# Altium PCB PCB2.PcbDoc (part 2 of 2)
Units mm, origin at the board's own origin, x right, y up, seen from the top; angles counter-clockwise.
Board outline 165.86 x 82.04 mm, 2 copper layers (Top Layer, Bottom Layer); 109 components, 117 nets, 440 pads, 32 vias.
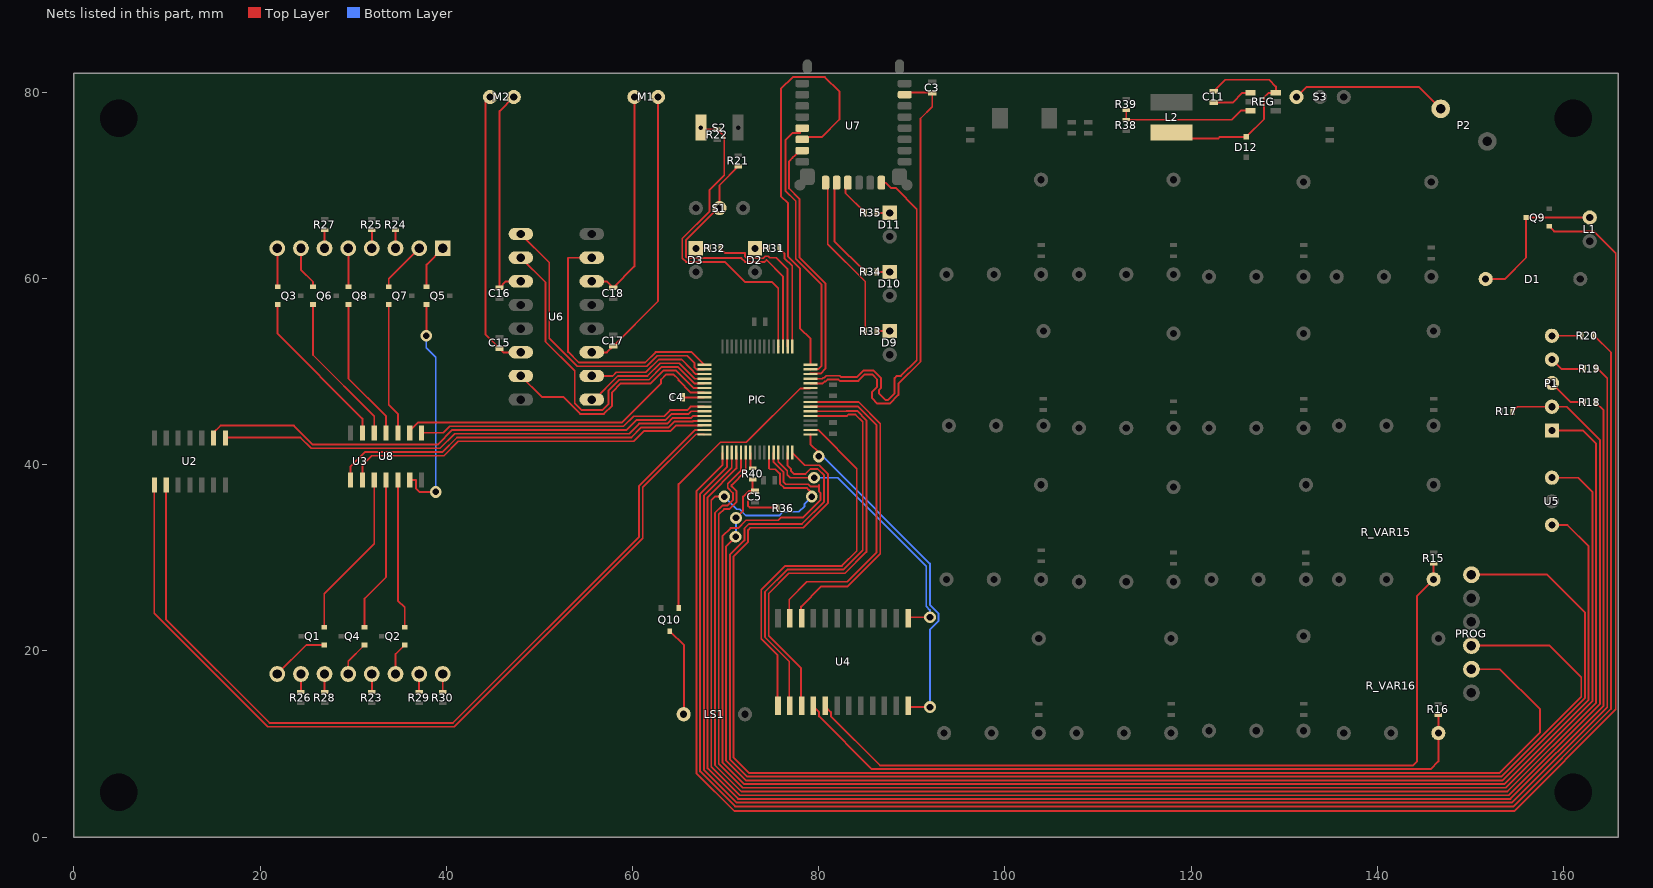
[diagram p2: the nets of this part, all layers, seen from the top]

## Via types
v1: diameter 1.27, hole 0.711, Top Layer to Bottom Layer, 32 vias

## Nets (pads, with @x,y where several pads share a name; then routed paths per layer and width w, separated by ;. In a path a pad name is that pad's centre, name@x,y a point inside that pad or via, vN(x,y) a via of type N, cw(c..) or ccw(c..) an arc to the next point about the centre after c; other vN are vias at no path point) (continued)
"INPUT 15": R15.2 R_VAR15.1 U4.17 | length 88.7
  Top Layer w0.2: U4.17@80.645,14.096 81.315,13.426 81.315,12.972 86.585,7.702 143.846,7.702 144.272,8.128 144.272,25.908 R_VAR15.1@146.05,27.686 R15.2@146.05,29.372
"INPUT 16": R16.2 R_VAR16.1 U4.16 | length 75.6
  Top Layer w0.2: U4.16@79.375,14.096 80.045,13.426 80.045,12.972 85.715,7.302 145.732,7.302 146.558,8.128 R_VAR16.1@146.558,11.176 R16.2@146.558,13.116
MCLR: PIC.7 R40.1 | length 1.8
  Top Layer w0.2: PIC.7@72.656,41.29 72.656,39.866 R40.1@72.898,39.624
NetC3_2: C3.2 PIC.28 U7.23 | length 50.9
  Top Layer w0.2: PIC.28@79.106,48.74 80.432,48.74 80.632,48.94 80.744,48.94 80.96,49.156 82.108,49.156 82.258,49.006 84.26,49.006 84.957,49.703 85.731,49.703 86.279,49.155 86.279,48.381 85.731,47.833 85.731,47.134 86.294,46.571 87.62,46.571 88.557,47.508 88.557,48.702 90.932,51.077 90.932,77.187 92.202,78.457 C3.2@92.202,79.918 92.123,79.997 89.232,79.997 U7.23@88.978,79.743
NetC4_1: C4.1 PIC.56 | length 2.3
  Top Layer w0.2: C4.1@65.37,47.244 65.374,47.24 PIC.56@67.706,47.24
NetC5_1: C5.1 PROG.1 R36.1 R40.2 | length 156.9
  Top Layer w0.2: v1(71.077,32.258) 70.061,31.242 70.061,8.213 72.172,6.102 153.469,6.102 162.3,14.933 162.3,24.136 158.242,28.194 PROG.1@150.114,28.194 ; v1(71.12,34.29) 71.882,35.052 71.882,36.576 72.482,37.176 C5.1@72.99,37.176 ; R40.2@72.898,38.424 72.898,37.43 C5.1@73.152,37.176 C5.1@72.99,37.176 ; R36.1@75.6,35.426 72.578,35.426 72.402,35.602 72.402,36.588 C5.1@72.99,37.176
  Bottom Layer w0.2: v1(71.077,32.258) 71.12,32.301 v1(71.12,34.29)
NetC11_1: C11.1 D12.2 L2.1 REG.6 | length 23.6
  Top Layer w0.2: L2.1@117.33,75.68 117.972,75.038 122.905,75.038 123.087,75.22 D12.2@125.92,75.22 127.828,77.128 127.828,79.458 128.314,79.944 129.112,79.944 129.112,80.618 128.38,81.35 123.676,81.35 C11.1@122.428,80.102
NetC11_2: C11.2 REG.1 | length 4.4
  Top Layer w0.2: C11.2@122.428,78.902 124.46,78.902 125.502,79.944 REG.1@126.412,79.944
NetC15_1: C15.1 M2.2 U6.14 | length 30.3
  Top Layer w0.2: M2.2@44.704,79.502 44.196,78.994 44.196,54.01 C15.1@45.72,52.486 46.136,52.07 U6.14@48.006,52.07
NetC16_2: C16.2 M2.1 U6.11 | length 23.7
  Top Layer w0.2: M2.1@47.244,79.502 45.72,77.978 C16.2@45.72,59.02 46.39,59.69 U6.11@48.006,59.69
NetC17_2: C17.2 M1.1 U6.3 | length 31.3
  Top Layer w0.2: U6.3@55.626,52.07 57.242,52.07 C17.2@57.912,52.74 62.738,57.566 M1.1@62.738,79.502
NetC18_1: C18.1 M1.2 U6.6 | length 24
  Top Layer w0.2: U6.6@55.626,59.69 57.242,59.69 C18.1@57.912,59.02 60.198,61.306 M1.2@60.198,79.502
NetD1_1: D1.1 L1.2 Q9.3 | length 16.4
  Top Layer w0.2: D1.1@151.638,59.944 D1.1@151.64,59.944 153.67,59.944 155.986,62.26 Q9.3@155.986,66.548 L1.2@162.814,66.548
NetD2_1: D2.1 R31.2 | length 1.4
  Top Layer w0.2: D2.1@73.152,63.246 R31.2@74.584,63.246
NetD3_1: D3.1 R32.2 | length 1.4
  Top Layer w0.2: D3.1@66.802,63.246 R32.2@68.234,63.246
NetD9_1: D9.1 R33.1 | length 1.4
  Top Layer w0.2: R33.1@86.198,54.356 D9.1@87.63,54.356
NetD10_1: D10.1 R34.1 | length 1.4
  Top Layer w0.2: R34.1@86.198,60.706 D10.1@87.63,60.706
NetD11_1: D11.1 R35.1 | length 1.4
  Top Layer w0.2: R35.1@86.198,67.056 D11.1@87.63,67.056
NetLS1_2: LS1.2 Q10.3 | length 9.6
  Top Layer w0.2: Q10.3@64.008,22.128 65.534,20.602 LS1.2@65.534,13.208
NetP1_1: P1.1 PIC.5 | length 168.4
  Top Layer w0.2: PIC.5@71.656,41.29 71.656,39.398 70.237,37.979 70.237,37.511 70.785,36.963 70.785,36.189 70.237,35.641 69.677,35.641 68.861,34.825 68.861,7.716 71.675,4.902 153.966,4.902 163.5,14.436 163.5,42.24 162.052,43.688 P1.1@158.75,43.688
NetP1_2: P1.2 PIC.11 R17.1 | length 190
  Top Layer w0.2: v1(69.85,36.576) 68.834,36.576 68.461,36.203 68.461,7.55 71.509,4.502 154.131,4.502 163.9,14.271 163.9,42.672 160.344,46.228 P1.2@158.75,46.228 155.032,46.228 R17.1@154.524,45.72 ; PIC.11@74.656,41.29 74.656,39.644 74.784,39.516 75.35,39.516 75.826,39.04 75.826,37.973 76.288,37.511 78.711,37.511 78.949,37.273 78.978,37.273 79.248,37.003 v1(79.248,36.576)
  Bottom Layer w0.2: v1(69.85,36.576) 71.201,35.225 71.507,35.225 72.188,34.544 75.744,34.544 76.144,34.944 77.87,34.944 78.486,35.56 78.486,35.814 v1(79.248,36.576) v1@79.243,36.576
NetP1_3: P1.3 R18.2 | length 4.3
  Top Layer w0.2: P1.3@158.75,48.768 160.782,46.736 R18.2@162.214,46.736
NetP1_4: P1.4 R19.2 | length 3.9
  Top Layer w0.2: P1.4@158.75,51.308 159.766,50.292 R19.2@162.214,50.292
NetP1_5: P1.5 R20.2 | length 3.2
  Top Layer w0.2: P1.5@158.75,53.848 R20.2@161.96,53.848
NetP2_1: P2.1 S3.1 | length 16.9
  Top Layer w0.2: S3.1@131.318,79.502 132.38,80.564 144.48,80.564 P2.1@146.812,78.232
NetPIC32Square_1: PIC.1 Q9.1 | length 197.9
  Top Layer w0.2: PIC.1@69.66,41.29 69.66,39.942 66.861,37.143 66.861,6.887 70.954,2.794 154.686,2.794 165.608,13.716 165.608,62.716 163.254,65.07 158.994,65.07 Q9.1@158.466,65.598
NetPIC32Square_2: PIC.2 R20.1 | length 180
  Top Layer w0.2: PIC.2@70.156,41.29 70.156,39.784 67.261,36.889 67.261,7.053 71.012,3.302 154.628,3.302 165.1,13.774 165.1,52.07 R20.1@163.322,53.848
NetPIC32Square_3: PIC.3 R19.1 | length 175.1
  Top Layer w0.2: PIC.3@70.656,41.29 70.656,39.668 67.661,36.673 67.661,7.219 71.178,3.702 154.463,3.702 164.7,13.939 164.7,49.276 163.684,50.292 R19.1@163.414,50.292
NetPIC32Square_4: PIC.4 R18.1 | length 169.9
  Top Layer w0.2: PIC.4@71.156,41.29 71.156,39.602 68.061,36.507 68.061,7.384 71.343,4.102 154.297,4.102 164.3,14.105 164.3,45.85 R18.1@163.414,46.736
NetPIC32Square_6: PIC.6 U5.3 | length 161.6
  Top Layer w0.2: PIC.6@72.156,41.29 72.156,39.332 70.637,37.814 70.637,37.677 71.185,37.129 71.185,36.023 70.403,35.241 69.843,35.241 69.261,34.659 69.261,7.881 71.84,5.302 153.8,5.302 163.1,14.602 163.1,37.084 161.576,38.608 U5.3@158.75,38.608
NetPIC32Square_12: PIC.12 U5.1 | length 164.9
  Top Layer w0.2: PIC.12@75.156,41.29 75.156,40.275 76.226,39.205 76.226,38.139 76.454,37.911 78.877,37.911 79.115,37.673 79.889,37.673 80.037,37.821 80.037,37.109 80.183,36.963 80.183,36.189 78.346,34.352 75.968,34.352 75.652,34.036 72.188,34.036 71.345,33.193 70.531,33.193 69.661,32.323 69.661,8.047 72.006,5.702 153.634,5.702 162.7,14.768 162.7,31.242 160.414,33.528 U5.1@158.75,33.528
NetPIC32Square_13: PIC.13 U4.1 | length 29.8
  Top Layer w0.2: PIC.13@75.656,41.29 75.656,40.341 76.626,39.371 76.626,38.901 76.919,38.608 v1(79.502,38.608) ; U4.1@89.535,23.622 v1(91.948,23.622)
  Bottom Layer w0.2: v1(79.502,38.608) 82.042,38.608 91.548,29.102 91.548,24.779 91.948,24.379 v1(91.948,23.622)
NetPIC32Square_15: PIC.15 PROG.4 | length 155.4
  Top Layer w0.2: PIC.15@76.656,41.29 76.656,39.907 77.026,39.537 77.026,39.306 77.324,39.008 78.58,39.008 79.115,39.543 79.889,39.543 80.583,38.849 80.583,36.023 78.196,33.636 72.498,33.636 72.012,33.15 72.012,31.871 70.461,30.32 70.461,8.378 72.337,6.502 153.303,6.502 161.9,15.099 161.9,17.17 158.496,20.574 PROG.4@150.114,20.574
NetPIC32Square_16: PIC.16 PROG.5 | length 143.5
  Top Layer w0.2: PIC.16@77.156,41.29 78.503,39.943 80.055,39.943 80.983,39.015 80.983,35.857 78.362,33.236 72.664,33.236 72.412,32.984 72.412,31.705 70.861,30.154 70.861,8.544 72.503,6.902 153.137,6.902 157.48,11.245 157.48,13.716 153.162,18.034 PROG.5@150.114,18.034
NetPIC32Square_17: PIC.17 U4.24 | length 38
  Top Layer w0.2: PIC.17@79.106,43.24 79.106,42.224 80.01,41.32 v1(80.01,40.894) ; U4.24@89.535,13.97 v1(91.948,13.97)
  Bottom Layer w0.2: v1(80.01,40.894) 80.436,40.894 91.948,29.382 91.948,24.944 92.883,24.009 92.883,23.235 91.948,22.3 v1(91.948,13.97)
NetPIC32Square_18: PIC.18 U4.13 | length 40.7
  Top Layer w0.2: U4.13@75.565,14.096 75.565,19.57 73.83,21.305 73.83,26.586 76.384,29.14 82.492,29.14 84.086,30.734 84.086,39.584 79.93,43.74 PIC.18@79.106,43.74
NetPIC32Square_21: PIC.21 U4.14 | length 45.5
  Top Layer w0.2: U4.14@76.835,14.096 76.835,18.865 74.23,21.47 74.23,26.334 76.636,28.74 82.658,28.74 84.728,30.81 84.728,44.61 83.953,45.385 83.179,45.385 83.034,45.24 PIC.21@79.106,45.24
NetPIC32Square_22: PIC.22 U4.15 | length 46.5
  Top Layer w0.2: U4.15@78.105,14.096 78.105,18.161 74.63,21.636 74.63,26.168 76.802,28.34 82.823,28.34 85.128,30.645 85.128,44.776 84.119,45.785 83.013,45.785 82.968,45.74 PIC.22@79.106,45.74
NetPIC32Square_23: PIC.23 U4.11 | length 35.1
  Top Layer w0.2: U4.11@76.835,23.496 76.835,25.527 78.74,27.432 83.047,27.432 86.214,30.599 86.214,44.256 84.23,46.24 PIC.23@79.106,46.24
NetPIC32Square_24: PIC.24 U4.10 | length 34.6
  Top Layer w0.2: U4.10@78.105,23.496 78.105,24.765 80.264,26.924 83.105,26.924 86.614,30.433 86.614,44.421 84.295,46.74 PIC.24@79.106,46.74
NetPIC32Square_27: PIC.27 Q10.1 | length 31.7
  Top Layer w0.2: Q10.1@64.958,24.608 64.958,37.916 69.452,42.41 72.235,42.41 78.015,48.19 79.056,48.19 PIC.27@79.106,48.24
NetPIC32Square_29: PIC.29 U7.15 | length 38.7
  Top Layer w0.2: PIC.29@79.106,49.24 80.367,49.24 80.467,49.34 80.578,49.34 80.794,49.556 82.274,49.556 82.424,49.406 84.094,49.406 84.791,50.103 85.897,50.103 86.679,49.321 86.679,48.215 86.46,47.996 86.46,47.671 87.16,46.971 87.454,46.971 88.157,47.674 88.157,49.306 88.391,49.54 88.829,49.54 90.532,51.243 90.532,67.466 88.255,69.743 87.738,69.743 87.188,70.293 U7.15@86.478,70.293
NetPIC32Square_30: PIC.30 U7.7 | length 27.5
  Top Layer w0.2: U7.7@77.978,73.743 77.478,73.243 77.475,73.243 77.182,72.95 77.182,72.947 76.828,72.593 76.828,69.67 77.928,68.571 77.928,62.276 80.71,59.493 80.71,50.303 80.197,49.79 79.056,49.79 PIC.30@79.106,49.74
NetPIC32Square_31: PIC.31 U7.5 | length 29.7
  Top Layer w0.2: U7.5@77.978,76.143 77.978,75.643 77.221,75.643 76.428,74.85 76.428,69.426 77.528,68.326 77.528,62.11 80.31,59.328 80.31,50.62 79.98,50.29 79.056,50.29 PIC.31@79.106,50.24
NetPIC32Square_32: PIC.32 U7.6 | length 46.5
  Top Layer w0.2: U7.6@77.978,74.943 78.219,75.184 80.316,75.184 82.215,77.083 82.215,80.091 80.663,81.643 77.221,81.643 75.946,80.368 75.946,68.834 76.708,68.072 76.708,62.364 77.978,61.094 77.978,54.683 79.122,53.539 79.122,50.756 PIC.32@79.106,50.74
NetPIC32Square_33: PIC.33 R31.1 | length 11.2
  Top Layer w0.2: R31.1@75.784,63.246 76.308,62.722 76.308,62.198 77.156,61.35 77.156,52.69 PIC.33@77.106,52.69
NetPIC32Square_34: PIC.34 R32.1 | length 16.9
  Top Layer w0.2: R32.1@69.434,63.246 69.92,62.76 72.09,62.76 72.09,62.36 72.266,62.184 74.038,62.184 74.243,62.389 74.575,62.389 74.734,62.23 75.438,62.23 76.656,61.012 PIC.34@76.656,52.69
NetPIC32Square_35: PIC.35 R21.1 S1.2 | length 31.1
  Top Layer w0.2: R21.1@71.374,72.044 69.342,70.012 S1.2@69.342,67.564 69.172,67.564 65.74,64.132 65.74,62.36 65.916,62.184 67.688,62.184 67.698,62.194 71.69,62.194 72.1,61.784 74.204,61.784 74.409,61.989 76.156,60.242 PIC.35@76.156,52.69
NetPIC32Square_36: PIC.36 R22.2 S2.2 | length 35.8
  Top Layer w0.2: S2.2@67.342,76.2 67.504,76.038 R22.2@69.088,76.038 69.85,75.276 69.85,71.086 68.28,69.516 68.28,67.238 65.34,64.298 65.34,62.194 65.75,61.784 69.916,61.784 72.056,59.644 74.976,59.644 75.656,58.964 75.656,52.69 PIC.36@75.692,52.726
NetPIC32Square_49: PIC.49 U6.7 | length 28.8
  Top Layer w0.2: U6.7@55.626,62.23 53.086,62.23 53.086,52.128 54.234,50.98 61.36,50.98 62.483,52.103 66.343,52.103 PIC.49@67.706,50.74
NetPIC32Square_50: PIC.50 U6.9 | length 31.7
  Top Layer w0.2: U6.9@48.006,64.77 51.054,61.722 51.054,53.594 54.068,50.58 61.525,50.58 62.648,51.703 65.899,51.703 66.656,50.946 66.656,50.466 66.882,50.24 PIC.50@67.706,50.24
NetPIC32Square_51: PIC.51 U6.2 | length 13.5
  Top Layer w0.2: U6.2@55.626,49.53 57.854,49.53 58.254,49.93 61.441,49.93 62.814,51.303 65.283,51.303 66.256,50.33 66.256,50.3 66.816,49.74 PIC.51@67.706,49.74
NetPIC32Square_52: PIC.52 U6.1 | length 14.4
  Top Layer w0.2: U6.1@55.626,46.99 55.88,46.99 58.42,49.53 61.607,49.53 62.98,50.903 65.036,50.903 66.699,49.24 PIC.52@67.706,49.24
NetPIC32Square_53: PIC.53 U6.10 | length 35.8
  Top Layer w0.2: U6.10@48.006,62.23 50.654,59.582 50.654,53.232 53.8,50.086 53.8,46.59 54.53,45.86 56.77,45.86 57.41,46.5 57.41,47.954 58.586,49.13 61.772,49.13 63.145,50.503 64.871,50.503 66.634,48.74 PIC.53@67.706,48.74
NetPIC32Square_54: PIC.54 U6.15 | length 24.9
  Top Layer w0.2: U6.15@48.006,49.53 50.254,47.282 52.542,47.282 54.364,45.46 56.936,45.46 57.81,46.334 57.81,47.789 58.751,48.73 61.938,48.73 63.311,50.103 64.705,50.103 66.568,48.24 PIC.54@67.706,48.24
NetPIC32Square_55: PIC.55 U8.9 | length 35.5
  Top Layer w0.2: U8.9@36.068,43.434 36.068,43.668 36.934,44.534 58.868,44.534 63.073,48.739 63.073,49.155 63.621,49.703 64.395,49.703 64.943,49.155 64.943,49.063 66.266,47.74 PIC.55@67.706,47.74
NetPIC32Square_58: PIC.58 U8.8 | length 31.5
  Top Layer w0.2: U8.8@37.338,43.434 39.686,43.434 40.386,44.134 59.033,44.134 60.111,45.212 63.392,45.212 64.046,45.866 65.874,45.866 66.248,46.24 PIC.58@67.706,46.24
NetPIC32Square_59: PIC.59 U2.2 | length 55.9
  Top Layer w0.2: U2.2@14.986,42.926 14.986,43.434 15.748,44.196 23.622,44.196 25.654,42.164 39.07,42.164 40.64,43.734 59.374,43.734 60.452,44.812 63.558,44.812 64.212,45.466 66.04,45.466 66.314,45.74 PIC.59@67.706,45.74
NetPIC32Square_60: PIC.60 U2.1 | length 53.4
  Top Layer w0.2: U2.1@16.256,42.926 24.326,42.926 25.488,41.764 39.324,41.764 40.894,43.334 59.628,43.334 60.706,44.412 63.723,44.412 64.339,45.028 66.306,45.028 66.518,45.24 PIC.60@67.706,45.24
NetPIC32Square_61: PIC.61 U8.1 | length 41
  Top Layer w0.2: U8.1@29.718,38.354 29.718,39.84 31.242,41.364 39.586,41.364 41.148,42.926 59.874,42.926 60.96,44.012 63.889,44.012 64.505,44.628 66.472,44.628 66.548,44.704 PIC.61@67.218,44.704
NetPIC32Square_62: PIC.62 U8.2 | length 39.8
  Top Layer w0.2: U8.2@30.988,38.354 30.988,39.948 32.004,40.964 39.752,40.964 41.304,42.516 60.118,42.516 61.214,43.612 64.055,43.612 64.639,44.196 PIC.62@67.47,44.196
NetPIC32Square_63: PIC.63 U2.9 | length 93.1
  Top Layer w0.2: U2.9@9.906,37.846 9.906,25.908 9.906,23.368 21.012,12.262 40.71,12.262 60.706,32.258 60.706,37.731 66.715,43.74 PIC.63@67.706,43.74
NetPIC32Square_64: PIC.64 U2.8 | length 94.4
  Top Layer w0.2: 8.636,26.612 U2.8@8.636,37.846 ; 8.636,26.924 8.636,24.072 20.846,11.862 40.876,11.862 61.106,32.092 61.106,37.565 66.819,43.278 67.668,43.278 PIC.64@67.706,43.24
NetR23_1: R23.1 U3.13 | length 1.9
  Top Layer w0.2: R23.1@32.004,15.586 U3.13@32.004,17.526
NetR24_1: R24.1 U3.3 | length 1.9
  Top Layer w0.2: U3.3@34.544,63.246 R24.1@34.544,65.186
NetR25_1: R25.1 U3.4 | length 1.9
  Top Layer w0.2: U3.4@32.004,63.246 R25.1@32.004,65.186
NetR26_1: R26.1 U3.10 | length 1.9
  Top Layer w0.2: R26.1@24.384,15.586 U3.10@24.384,17.526
NetR27_1: R27.1 U3.6 | length 1.9
  Top Layer w0.2: U3.6@26.924,63.246 R27.1@26.924,65.186
NetR28_1: R28.1 U3.11 | length 1.9
  Top Layer w0.2: R28.1@26.924,15.586 U3.11@26.924,17.526
NetR29_1: R29.1 U3.15 | length 1.9
  Top Layer w0.2: R29.1@37.084,15.586 U3.15@37.084,17.526
NetR30_1: R30.1 U3.16 | length 1.9
  Top Layer w0.2: R30.1@39.624,15.586 U3.16@39.624,17.526
NetR38_2: R38.2 R39.1 REG.3 | length 14.9
  Top Layer w0.2: R39.1@113.03,78.14 R39.1@113.03,78.094 R38.2@113.03,77.054 124.356,77.054 125.346,78.044 REG.3@126.412,78.044
PIO1: R33.2 U7.10 | length 17.8
  Top Layer w0.2: U7.10@80.478,70.293 80.978,69.793 80.978,63.702 84.998,59.682 R33.2@84.998,54.356
PIO2: R34.2 U7.11 | length 11
  Top Layer w0.2: U7.11@81.678,70.293 81.678,64.026 R34.2@84.998,60.706
PIO3: R35.2 U7.12 | length 4.1
  Top Layer w0.2: U7.12@82.878,70.293 82.878,69.176 R35.2@84.998,67.056
Q1: Q1.2 U8.3 | length 18
  Top Layer w0.2: Q1.2@26.894,22.54 26.894,26.132 32.258,31.496 U8.3@32.258,38.354
Q2: Q2.2 U8.5 | length 16.1
  Top Layer w0.2: U8.5@34.798,38.354 34.798,25.4 35.53,24.668 Q2.2@35.53,22.54
Q3: Q3.2 U8.13 | length 17.6
  Top Layer w0.2: Q3.2@21.874,57.216 21.874,54.072 30.988,44.958 U8.13@30.988,43.434
Q4: Q4.2 U8.4 | length 16.8
  Top Layer w0.2: Q4.2@31.212,22.54 31.212,25.624 33.528,27.94 U8.4@33.528,38.354
Q5: Q5.2 U8.6 | length 24.4
  Top Layer w0.2: U8.6@36.068,38.354 36.759,38.354 36.759,37.428 37.102,37.084 v1(38.862,37.084) ; v1(37.846,53.848) 37.876,53.878 Q5.2@37.876,57.216
  Bottom Layer w0.2: v1(37.846,53.848) 37.846,52.578 38.862,51.562 v1(38.862,37.084)
Q6: Q6.2 U8.12 | length 16.5
  Top Layer w0.2: Q6.2@25.684,57.216 25.684,51.786 32.258,45.212 U8.12@32.258,43.434
Q7: Q7.2 U8.10 | length 14.2
  Top Layer w0.2: Q7.2@33.812,57.216 33.812,46.452 34.798,45.466 U8.10@34.798,43.434
Q8: Q8.2 U8.11 | length 15.5
  Top Layer w0.2: Q8.2@29.494,57.216 29.494,49.246 33.528,45.212 U8.11@33.528,43.434
"ROW 1": Q1.1 U3.9 | length 6.3
  Top Layer w0.2: U3.9@21.844,17.526 24.958,20.64 Q1.1@26.894,20.64
"ROW 2": Q2.1 U3.14 | length 3.5
  Top Layer w0.2: U3.14@34.544,17.526 34.544,19.654 Q2.1@35.53,20.64
"ROW 3": Q3.1 U3.8 | length 4.1
  Top Layer w0.2: U3.8@21.844,63.246 21.874,63.216 Q3.1@21.874,59.116
"ROW 4": Q4.1 U3.12 | length 3.8
  Top Layer w0.2: U3.12@29.464,17.526 29.464,18.892 Q4.1@31.212,20.64
"ROW 5": Q5.1 U3.1 | length 4.9
  Top Layer w0.2: Q5.1@37.876,59.116 37.876,61.498 U3.1@39.624,63.246
"ROW 6": Q6.1 U3.7 | length 4.7
  Top Layer w0.2: U3.7@24.384,63.246 24.384,60.96 25.684,59.66 Q6.1@25.684,59.116
"ROW 7": Q7.1 U3.2 | length 5.5
  Top Layer w0.2: Q7.1@33.812,59.116 33.812,59.974 U3.2@37.084,63.246
"ROW 8": Q8.1 U3.5 | length 4.1
  Top Layer w0.2: U3.5@29.464,63.246 29.494,63.216 Q8.1@29.494,59.116
pads on no net: PIC.8 PIC.14 PIC.37 PIC.39 PIC.40 PIC.42 PIC.43 PIC.44 PIC.45 PIC.46 PIC.47 PIC.48 PROG.6 R_VAR1.3 R_VAR1.4 R_VAR2.3 R_VAR2.4 R_VAR3.3 R_VAR3.4 R_VAR4.3 R_VAR4.4 R_VAR5.3 R_VAR5.4 R_VAR6.3 R_VAR6.4 R_VAR7.3 R_VAR7.4 R_VAR8.3 R_VAR8.4 R_VAR9.3 R_VAR9.4 R_VAR10.3 R_VAR10.4 R_VAR11.3 R_VAR11.4 R_VAR12.3 R_VAR12.4 R_VAR13.3 R_VAR13.4 R_VAR14.3 R_VAR14.4 R_VAR15.3 R_VAR15.4 R_VAR16.3 R_VAR16.4 S1.3 S3.3 U7.1A U7.2 U7.3 U7.4 U7.8 U7.13 U7.14 U7.17 U7.18 U7.19 U7.20 U7.21 U7.22 U7.24A

## Polygon pours and split planes (outlines as drawn)
GND on Bottom Layer "GND" (solid, remove dead copper, pour order 8): 0,0 165.862,0 165.862,82.042 0,82.042
GND on Bottom Layer "GND" (solid, pour order 10): 0,82.042 0,0 165.862,0 165.862,82.042

## Silkscreen, mask and mechanical layers (free items; w line width, h text height)
Mechanical 11:
  lines w1: 165.824,0 0,0 0,82.042 165.824,82.042 ; 165.862,0 165.862,82.042
Drill Drawing:
  circle w0.025: c-62.325,-38.122 r0.381
  circle w0.025: c-62.325,-38.122 r0.635
  circle w0.025: c-62.325,-60.982 r0.635
  lines w0.025: -62.96,-57.807 -61.69,-57.807 -61.69,-56.537 -62.96,-56.537 -62.96,-57.807 ; -62.96,-53.997 -62.325,-53.679 -61.69,-53.997 -62.007,-53.362 -61.69,-52.727 -62.325,-53.044 -62.96,-52.727 -62.642,-53.362 -62.96,-53.997 ; -62.96,-49.869 -62.642,-49.869 -62.325,-50.187 -62.007,-49.869 -61.69,-49.869 -62.007,-49.552 -61.69,-49.234 -62.007,-49.234 -62.325,-48.917 -62.642,-49.234 -62.96,-49.234 -62.642,-49.552 -62.96,-49.869 ; -62.96,-46.059 -62.642,-46.059 -62.642,-46.377 -62.007,-46.377 -62.007,-46.059 -61.69,-46.059 -61.69,-45.424 -62.007,-45.424 -62.007,-45.107 -62.642,-45.107 -62.642,-45.424 -62.96,-45.424 -62.96,-46.059 ; -62.96,-42.567 -62.96,-42.249 -62.642,-41.932 -62.96,-41.614 -62.96,-41.297 -62.642,-41.297 -62.325,-41.614 -62.007,-41.297 -61.69,-41.297 -61.69,-41.614 -62.007,-41.932 -61.69,-42.249 -61.69,-42.567 -62.007,-42.567 -62.325,-42.249 -62.642,-42.567 -62.96,-42.567
  lines w0.381: -64.69,-62.76 292.129,-62.76 ; -64.69,-36.09 292.129,-36.09 ; -50.698,-66.57 -50.698,-32.28 ; -35.716,-66.57 -35.716,-32.28 ; -6.514,-66.57 -6.514,-32.28 ; 6.335,-66.57 6.335,-32.28 ; 24.974,-66.57 24.974,-32.28 ; 55.191,-66.57 55.191,-32.28 ; 81.599,-66.57 81.599,-32.28 ; 108.008,-66.57 108.008,-32.28 ; 134.416,-66.57 134.416,-32.28 ; 160.824,-66.57 160.824,-32.28 ; 194.698,-66.57 194.698,-32.28 ; 228.571,-66.57 228.571,-32.28 ; 256.503,-66.57 256.503,-32.28 ; -64.69,-66.57 292.129,-66.57 292.129,-32.28 -64.69,-32.28 -64.69,-66.57
  text "Symbol" at -62.404,-34.947 h1.83
  text "Count" at -49.555,-34.947 h1.83
  text "Hole Size" at -34.573,-34.947 h1.83
  text "Plated" at -5.371,-34.947 h1.83
  text "Hole Type" at 7.478,-34.947 h1.83
  text "Drill Layer Pair" at 26.117,-34.947 h1.83
  text "Via/Pad" at 56.334,-34.947 h1.83
  text "Pad Shape" at 82.742,-34.947 h1.83
  text "Template" at 109.151,-34.947 h1.83
  text "Description" at 135.559,-34.947 h1.83
  text "Hole Tolerance (+)" at 161.967,-34.947 h1.83
  text "Hole Tolerance (-)" at 195.841,-34.947 h1.83
  text "Hole Length" at 229.714,-34.947 h1.83
  text "Routed Path Length" at 257.646,-34.947 h1.83
  text "2" at -49.555,-38.757 h1.52
  text "0.500mm (19.69mil)" at -34.573,-38.757 h1.52
  text "PTH" at -5.371,-38.757 h1.52
  text "Slot" at 7.478,-38.757 h1.52
  text "0.000mm (0.00mil)" at 26.117,-38.757 h1.52
  text "0.000mm (0.00mil)" at 56.334,-38.757 h1.52
  text "0.000mm (0.00mil)" at 82.742,-38.757 h1.52
  text "0.000mm (0.00mil)" at 109.151,-38.757 h1.52
  text "0.000mm (0.00mil)" at 135.559,-38.757 h1.52
  text "0.000mm (0.00mil)" at 161.967,-38.757 h1.52
  text "0.000mm (0.00mil)" at 195.841,-38.757 h1.52
  text "2.300mm (90.55mil)" at 229.714,-38.757 h1.52
  text "1.800mm (70.87mil)" at 257.646,-38.757 h1.52
  text "4" at -49.555,-42.567 h1.52
  text "4.000mm (157.48mil)" at -34.573,-42.567 h1.52
  text "NPTH" at -5.371,-42.567 h1.52
  text "Round" at 7.478,-42.567 h1.52
  text "0.000mm (0.00mil)" at 26.117,-42.567 h1.52
  text "0.000mm (0.00mil)" at 56.334,-42.567 h1.52
  text "0.000mm (0.00mil)" at 82.742,-42.567 h1.52
  text "0.000mm (0.00mil)" at 109.151,-42.567 h1.52
  text "0.000mm (0.00mil)" at 135.559,-42.567 h1.52
  text "0.000mm (0.00mil)" at 161.967,-42.567 h1.52
  text "0.000mm (0.00mil)" at 195.841,-42.567 h1.52
  text "6" at -49.555,-46.377 h1.52
  text "1.020mm (40.16mil)" at -34.573,-46.377 h1.52
  text "PTH" at -5.371,-46.377 h1.52
  text "Round" at 7.478,-46.377 h1.52
  text "0.000mm (0.00mil)" at 26.117,-46.377 h1.52
  text "0.000mm (0.00mil)" at 56.334,-46.377 h1.52
  text "0.000mm (0.00mil)" at 82.742,-46.377 h1.52
  text "0.000mm (0.00mil)" at 109.151,-46.377 h1.52
  text "0.000mm (0.00mil)" at 135.559,-46.377 h1.52
  text "0.000mm (0.00mil)" at 161.967,-46.377 h1.52
  text "0.000mm (0.00mil)" at 195.841,-46.377 h1.52
  text "16" at -49.555,-50.187 h1.52
  text "0.900mm (35.43mil)" at -34.573,-50.187 h1.52
  text "PTH" at -5.371,-50.187 h1.52
  text "Round" at 7.478,-50.187 h1.52
  text "0.000mm (0.00mil)" at 26.117,-50.187 h1.52
  text "0.000mm (0.00mil)" at 56.334,-50.187 h1.52
  text "0.000mm (0.00mil)" at 82.742,-50.187 h1.52
  text "0.000mm (0.00mil)" at 109.151,-50.187 h1.52
  text "0.000mm (0.00mil)" at 135.559,-50.187 h1.52
  text "0.000mm (0.00mil)" at 161.967,-50.187 h1.52
  text "0.000mm (0.00mil)" at 195.841,-50.187 h1.52
  text "18" at -49.555,-53.997 h1.52
  text "1.000mm (39.37mil)" at -34.573,-53.997 h1.52
  text "PTH" at -5.371,-53.997 h1.52
  text "Round" at 7.478,-53.997 h1.52
  text "0.000mm (0.00mil)" at 26.117,-53.997 h1.52
  text "0.000mm (0.00mil)" at 56.334,-53.997 h1.52
  text "0.000mm (0.00mil)" at 82.742,-53.997 h1.52
  text "0.000mm (0.00mil)" at 109.151,-53.997 h1.52
  text "0.000mm (0.00mil)" at 135.559,-53.997 h1.52
  text "0.000mm (0.00mil)" at 161.967,-53.997 h1.52
  text "0.000mm (0.00mil)" at 195.841,-53.997 h1.52
  text "32" at -49.555,-57.807 h1.52
  text "0.711mm (28.00mil)" at -34.573,-57.807 h1.52
  text "PTH" at -5.371,-57.807 h1.52
  text "Round" at 7.478,-57.807 h1.52
  text "0.000mm (0.00mil)" at 26.117,-57.807 h1.52
  text "0.000mm (0.00mil)" at 56.334,-57.807 h1.52
  text "0.000mm (0.00mil)" at 82.742,-57.807 h1.52
  text "0.000mm (0.00mil)" at 109.151,-57.807 h1.52
  text "0.000mm (0.00mil)" at 135.559,-57.807 h1.52
  text "0.000mm (0.00mil)" at 161.967,-57.807 h1.52
  text "0.000mm (0.00mil)" at 195.841,-57.807 h1.52
  text "98" at -49.555,-61.617 h1.52
  text "0.762mm (30.00mil)" at -34.573,-61.617 h1.52
  text "PTH" at -5.371,-61.617 h1.52
  text "Round" at 7.478,-61.617 h1.52
  text "0.000mm (0.00mil)" at 26.117,-61.617 h1.52
  text "0.000mm (0.00mil)" at 56.334,-61.617 h1.52
  text "0.000mm (0.00mil)" at 82.742,-61.617 h1.52
  text "0.000mm (0.00mil)" at 109.151,-61.617 h1.52
  text "0.000mm (0.00mil)" at 135.559,-61.617 h1.52
  text "0.000mm (0.00mil)" at 161.967,-61.617 h1.52
  text "0.000mm (0.00mil)" at 195.841,-61.617 h1.52
  text "176 Total" at -49.555,-65.427 h1.52

## Dimensions
0,0 to 165.862,0 on Mechanical 1
0,0 to 0,82.042 on Mechanical 1

## Text inside footprints (layer, text, board x,y; h text height)
D1: Top Overlay "C" at 156.085,59.69 h0.6 r90
D2: Bottom Overlay "A" at 75.057,63.5 h0.7 r90
D3: Bottom Overlay "A" at 68.707,63.5 h0.7 r90
D9: Bottom Overlay "A" at 89.535,54.61 h0.7 r90
D10: Bottom Overlay "A" at 89.535,60.96 h0.7 r90
D11: Bottom Overlay "A" at 89.535,67.31 h0.7 r90
D12: Top Overlay "A" at 126.047,73.866 h0.3 r90
Q1: Top Overlay "S" at 26.162,22.733 h0.3 r180; Top Overlay "G" at 26.162,20.828 h0.3 r180; Top Overlay "D" at 25.4,21.74 h0.3 r180
Q2: Top Overlay "S" at 34.798,22.733 h0.3 r180; Top Overlay "G" at 34.798,20.828 h0.3 r180; Top Overlay "D" at 34.036,21.74 h0.3 r180
Q3: Top Overlay "S" at 22.606,57.023 h0.3; Top Overlay "G" at 22.606,58.928 h0.3; Top Overlay "D" at 23.368,58.016 h0.3
Q4: Top Overlay "S" at 30.48,22.733 h0.3 r180; Top Overlay "G" at 30.48,20.828 h0.3 r180; Top Overlay "D" at 29.718,21.74 h0.3 r180
Q5: Top Overlay "S" at 38.608,57.023 h0.3; Top Overlay "G" at 38.608,58.928 h0.3; Top Overlay "D" at 39.37,58.016 h0.3
Q6: Top Overlay "S" at 26.416,57.023 h0.3; Top Overlay "G" at 26.416,58.928 h0.3; Top Overlay "D" at 27.178,58.016 h0.3
Q7: Top Overlay "S" at 34.544,57.023 h0.3; Top Overlay "G" at 34.544,58.928 h0.3; Top Overlay "D" at 35.306,58.016 h0.3
Q8: Top Overlay "S" at 30.226,57.023 h0.3; Top Overlay "G" at 30.226,58.928 h0.3; Top Overlay "D" at 30.988,58.016 h0.3
Q9: Top Overlay "S" at 157.734,67.691 h0.3 r180; Top Overlay "G" at 157.734,65.786 h0.3 r180; Top Overlay "D" at 156.972,66.698 h0.3 r180
Q10: Top Overlay "S" at 62.865,23.876 h0.3 r270; Top Overlay "G" at 64.77,23.876 h0.3 r270; Top Overlay "D" at 63.858,23.114 h0.3 r270
R_VAR1: Bottom Overlay "Vcc" at 101.727,61.976 h0.6 r270; Bottom Overlay "GND" at 101.727,67.564 h0.6 r270
R_VAR2: Bottom Overlay "Vcc" at 101.981,45.72 h0.6 r270; Bottom Overlay "GND" at 101.981,51.308 h0.6 r270
R_VAR3: Bottom Overlay "Vcc" at 101.727,29.21 h0.6 r270; Bottom Overlay "GND" at 101.727,34.798 h0.6 r270
R_VAR4: Bottom Overlay "Vcc" at 101.473,12.7 h0.6 r270; Bottom Overlay "GND" at 101.473,18.288 h0.6 r270
R_VAR5: Bottom Overlay "Vcc" at 115.951,61.976 h0.6 r270; Bottom Overlay "GND" at 115.951,67.564 h0.6 r270
R_VAR6: Bottom Overlay "Vcc" at 115.951,45.466 h0.6 r270; Bottom Overlay "GND" at 115.951,51.054 h0.6 r270
R_VAR7: Bottom Overlay "Vcc" at 115.951,28.956 h0.6 r270; Bottom Overlay "GND" at 115.951,34.544 h0.6 r270
R_VAR8: Bottom Overlay "Vcc" at 115.697,12.7 h0.6 r270; Bottom Overlay "GND" at 115.697,18.288 h0.6 r270
R_VAR9: Bottom Overlay "Vcc" at 129.921,61.722 h0.6 r270; Bottom Overlay "GND" at 129.921,67.31 h0.6 r270
R_VAR10: Bottom Overlay "Vcc" at 129.921,45.466 h0.6 r270; Bottom Overlay "GND" at 129.921,51.054 h0.6 r270
R_VAR11: Bottom Overlay "Vcc" at 130.175,29.21 h0.6 r270; Bottom Overlay "GND" at 130.175,34.798 h0.6 r270
R_VAR12: Bottom Overlay "Vcc" at 129.921,12.954 h0.6 r270; Bottom Overlay "GND" at 129.921,18.542 h0.6 r270
R_VAR13: Bottom Overlay "Vcc" at 143.637,61.722 h0.6 r270; Bottom Overlay "GND" at 143.637,67.31 h0.6 r270
R_VAR14: Bottom Overlay "Vcc" at 143.891,45.72 h0.6 r270; Bottom Overlay "GND" at 143.891,51.308 h0.6 r270
R_VAR15: Bottom Overlay "Vcc" at 143.891,29.21 h0.6 r270; Bottom Overlay "GND" at 143.891,34.798 h0.6 r270
R_VAR16: Bottom Overlay "Vcc" at 144.399,12.7 h0.6 r270; Bottom Overlay "GND" at 144.399,18.288 h0.6 r270
U3: Bottom Overlay "16" at 45.734,16.886 h1.52; Bottom Overlay "9" at 17.734,16.886 h1.52; Bottom Overlay "8" at 17.734,62.386 h1.52; Bottom Overlay "1" at 43.734,62.386 h1.52